# Altium PCB Sandbox.PcbDoc
Units mm, origin at the board's own origin, x right, y up, seen from the top; angles counter-clockwise.
Board outline 240 x 130 mm, 2 copper layers (Top Layer, Bottom Layer); 14 components, 8 nets, 28 pads, 0 vias.
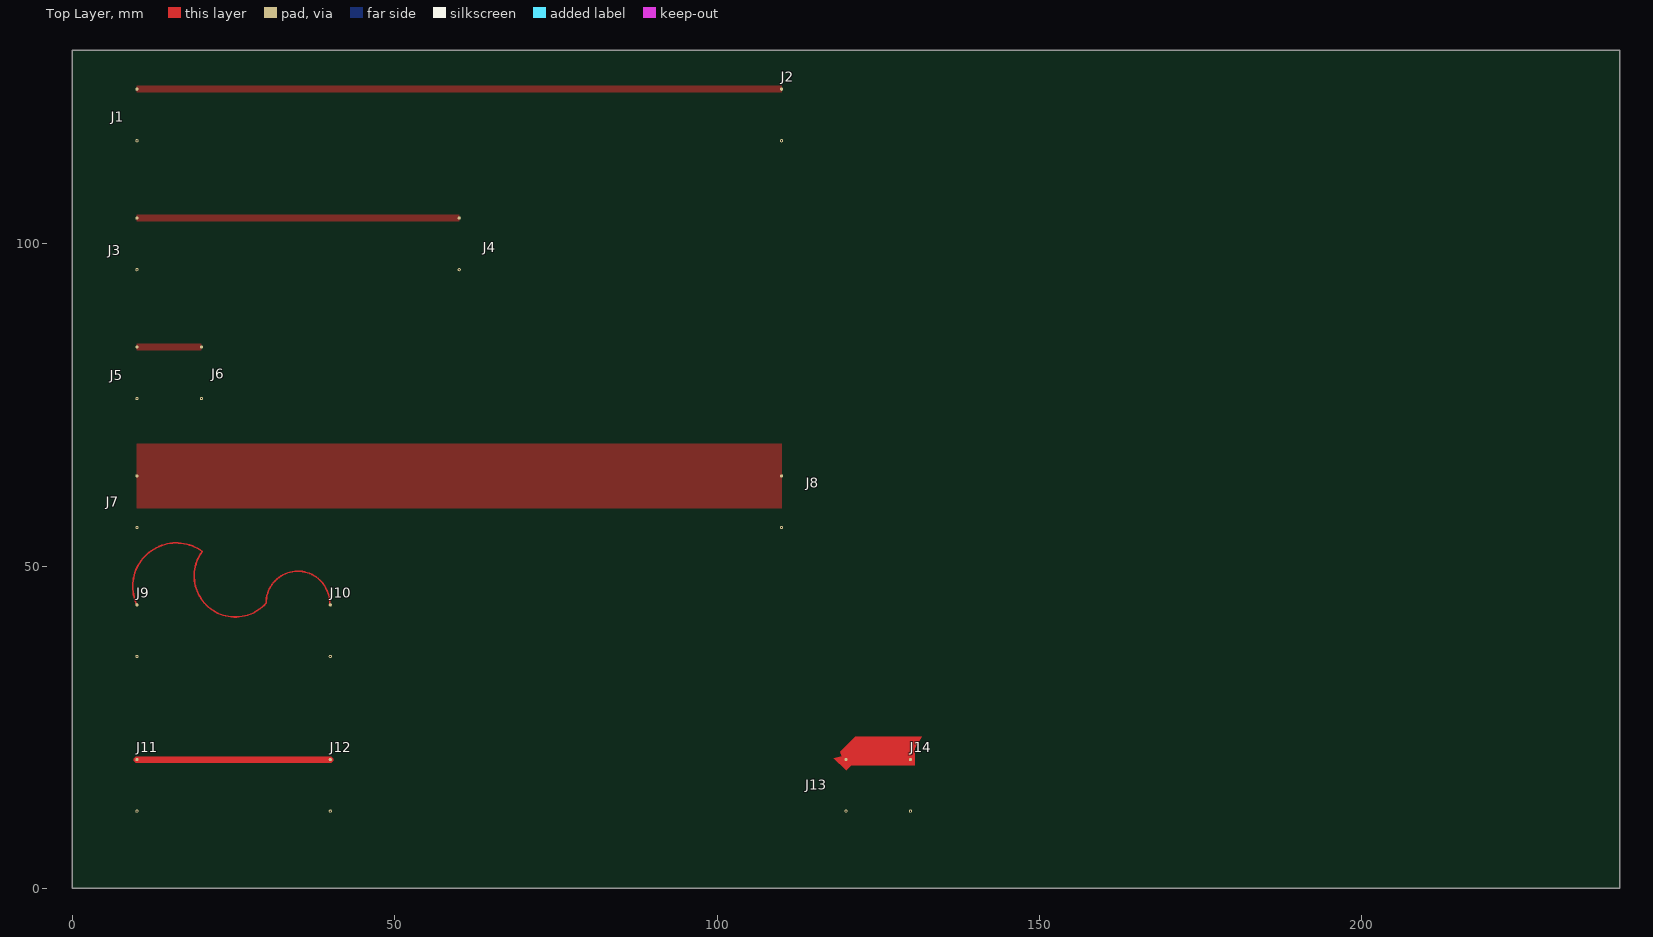
[diagram p0: Top Layer view]
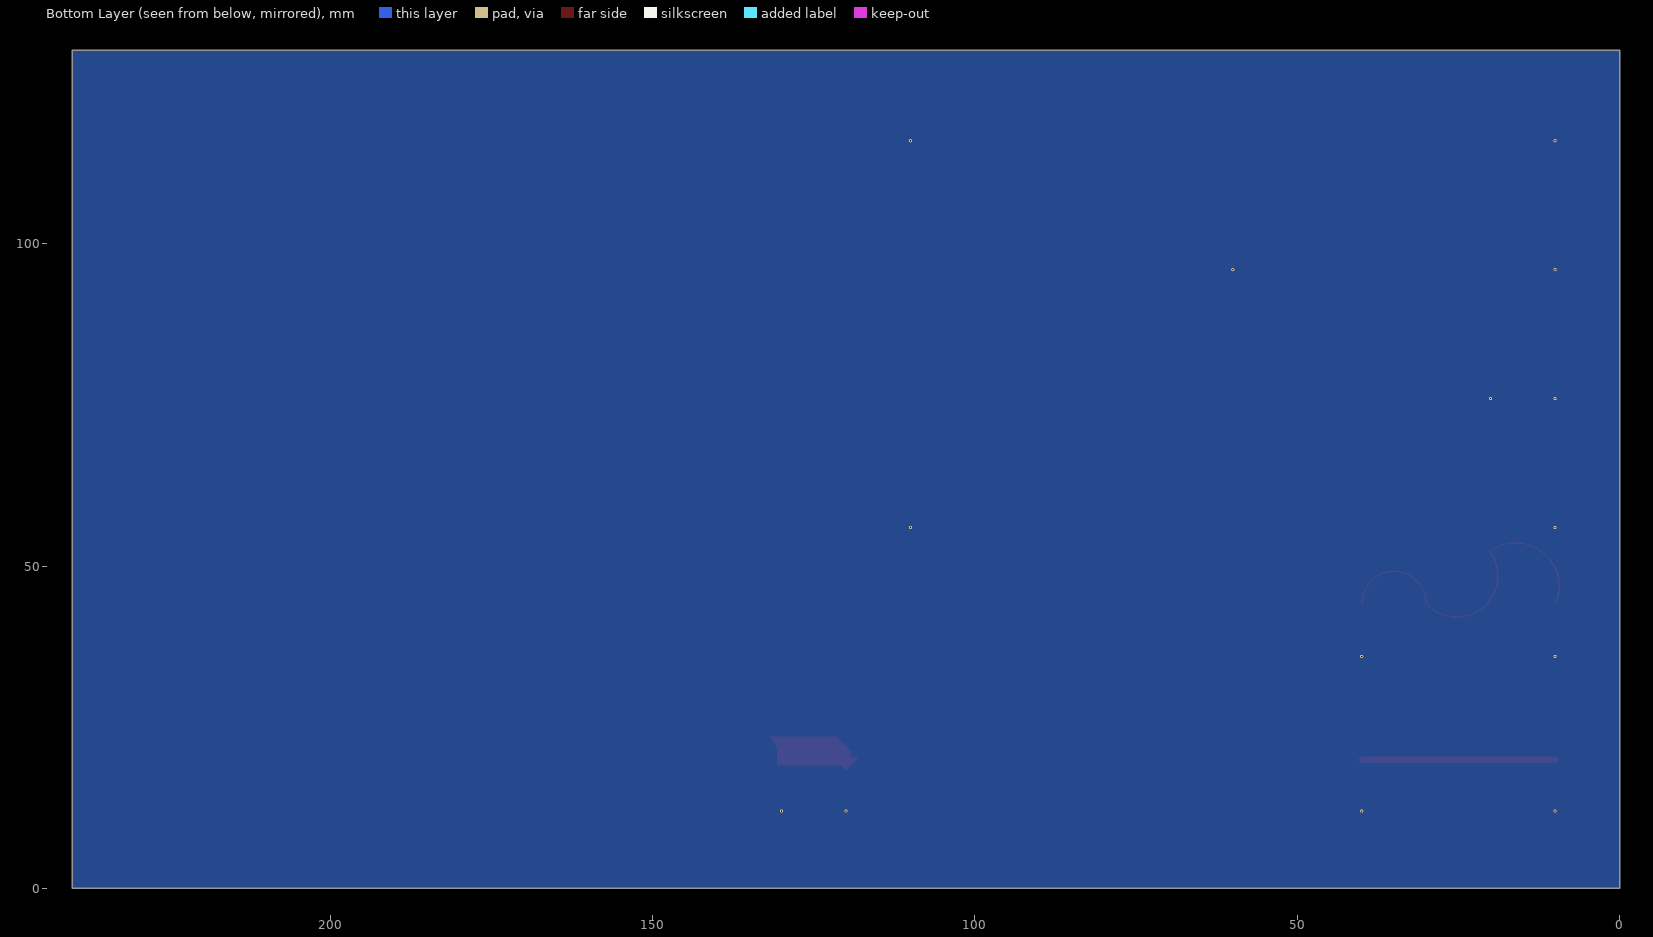
[diagram p1: Bottom Layer view, seen from below]

## Layer stack, top to bottom
Top Solder: solder mask 0.0102, Solder Resist, Dk 3.5
Top Layer: signal copper 0.0356
Dielectric 1: dielectric 0.32, FR-4, Dk 4.8
Bottom Layer: signal copper 0.0356
Bottom Solder: solder mask 0.0102, Solder Resist, Dk 3.5

## Board outline
0,0 0,130 240,130 240,0

## Design rules (kind name [scope] priority, off if disabled: settings)
Clearance [All] p1: gap=0.254 ignorepadtopadclearanceinfootprint=FALSE
PolygonConnect [All] p1: connectstyle=Direct reliefconductorwidth=0.254 reliefentries=4 polygonreliefangle="90 Angle" airgapwidth=0.254
RoutingVias [All] p1: holewidth=0.711 width=1.27 viastyle="Through Hole" minholewidth=0.711 minwidth=1.27 maxholewidth=0.711 maxwidth=1.27
SolderMaskExpansion [All] p1: expansion=0.102 istentingtop=FALSE
SupplyNets "Schematic Supply Nets" [InNet('GND')] p1: voltage=0.000
Width [All] p1: maxlimit=0.254 minlimit=0.254 preferedwidth=0.254
30 further rules are at their usual default settings.

## Components (designator, comment, footprint, x,y, rotation, side; value= is the part's Value field where it differs from the comment)
J1 "test_connector" test_connector_footprint 10,120 r270 top
J2 "test_connector" test_connector_footprint 110,120 r270 top
J3 "test_connector" test_connector_footprint 10,100 r270 top
J4 "test_connector" test_connector_footprint 60,100 r270 top
J5 "test_connector" test_connector_footprint 10,80 r270 top
J6 "test_connector" test_connector_footprint 20,80 r270 top
J7 "test_connector" test_connector_footprint 10,60 r270 top
J8 "test_connector" test_connector_footprint 110,60 r270 top
J9 "test_connector" test_connector_footprint 10,40 r270 top
J10 "test_connector" test_connector_footprint 40,40 r270 top
J11 "test_connector" test_connector_footprint 10,16 r270 top
J12 "test_connector" test_connector_footprint 40,16 r270 top
J13 "test_connector" test_connector_footprint 120,16 r270 top
J14 "test_connector" test_connector_footprint 130,16 r270 top

## Footprints (in the part's own frame and the unit in brackets; to place one, negate y for a bottom-side part, rotate by r counter-clockwise, add the part's x,y. Pads: shape width x height; smd on the part's side, far side on the other; paste and mask are expansions set on the pad)
test_connector_footprint [mm]
  round 0.5 smd: 1(-4,0)
  round 0.5 hole 0.2: 2(4,0)

## Part data
J1 J2 J3 J4 J5 J6 J7 J8 J9 J10 J11 J12 J13 J14: library part test_conn, "for playing around with", Manufacturer="Phoenix Contact", Manufacturer Part Number=1729128, Component Type=Connectors, PDN_I=1, PDN_N_NET=gndA, PDN_P_NET=P1V0A, PDN_ROLE=SINK

## Nets (pads, with @x,y where several pads share a name; then routed paths per layer and width w, separated by ;. In a path a pad name is that pad's centre, name@x,y a point inside that pad or via, vN(x,y) a via of type N, cw(c..) or ccw(c..) an arc to the next point about the centre after c; other vN are vias at no path point)
GND: J1.2 J2.2 J3.2 J4.2 J5.2 J6.2 J7.2 J8.2 J9.2 J10.2 J11.2 J12.2 J13.2 J14.2
P1V_1W10L: J5.1 J6.1
P1V_1W50L: J3.1 J4.1
P1V_1W100L: J1.1 J2.1
P1V_10W100L: J7.1 J8.1
P1V_ARC: J9.1 J10.1 | length 53.1
  Top Layer w0.254: J9.1 cw(c16.055,46.876) 10.668,50.866 cw(c16.107,46.838) 20.136,52.276 ccw(c25.257,48.483) 30.035,44.267 cw(c34.964,44.29) J10.1@39.885,44.007
P1V_REGION: J13.1 J14.1
P1V_TRACE: J11.1 J12.1 | length 30
  Top Layer w1: J11.1 J12.1

## Polygon pours and split planes (outlines as drawn)
P1V_10W100L on Top Layer "-2V5_PG" (solid, pour order 19): 10,59 10,69 110,69 110,59
P1V_1W10L on Top Layer "-2V5_PG" (solid, pour order 18): 10,83.5 10,84.5 20,84.5 20,83.5
P1V_1W50L on Top Layer "-2V5_PG" (solid, pour order 17): 10,103.5 10,104.5 60,104.5 60,103.5
P1V_1W100L on Top Layer "-2V5_PG" (solid, pour order 16): 10,123.5 10,124.5 110,124.5 110,123.5
GND on Bottom Layer "GND_L02_P014" (solid, pour order 14): 0,0 0,130 240,130 240,0

## Other copper
Top Layer:
  region net P1V_REGION: 119.334,20.54 118.127,20.222 120.032,18.317 120.794,19.079 130.7,19.079 130.7,19.968 130.7,21.746 131.716,23.524 121.429,23.524 119.143,21.238

## Silkscreen, mask and mechanical layers (free items; w line width, h text height)
Board:
  the board outline again, w0.1